# EAGLE board OLED Shield R2 (EAGLE 6.4)
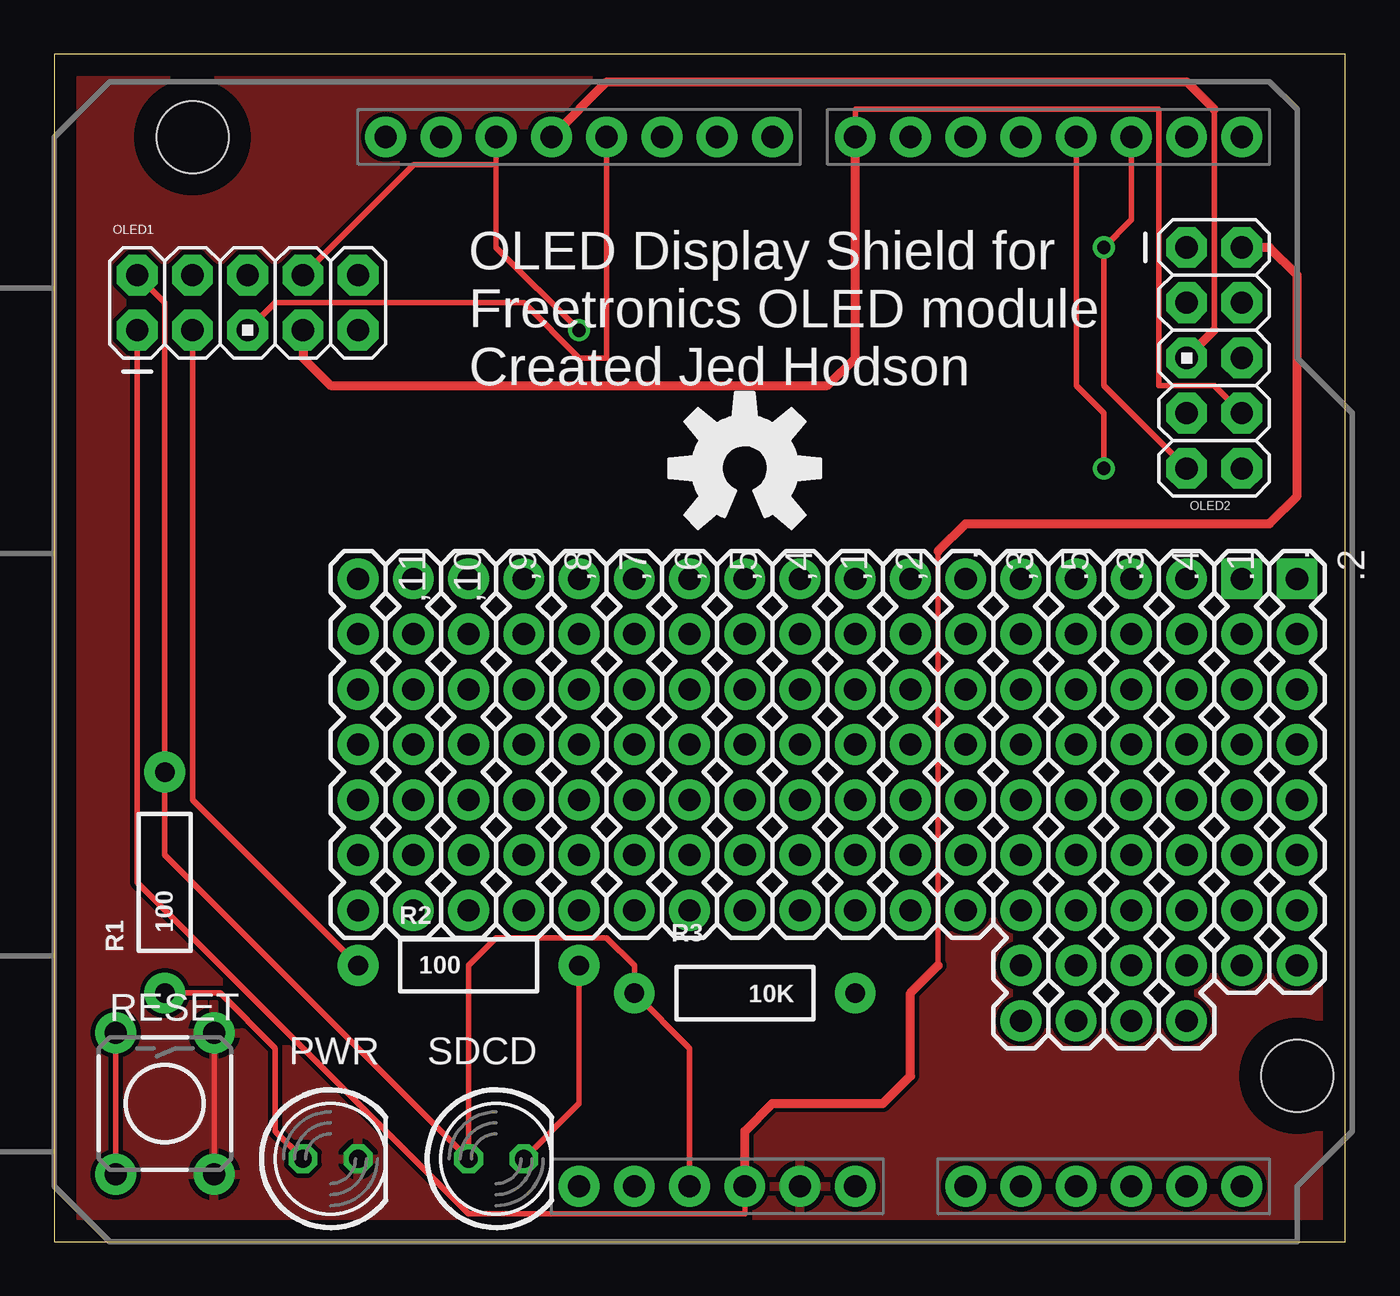
[diagram p0: board, top side]
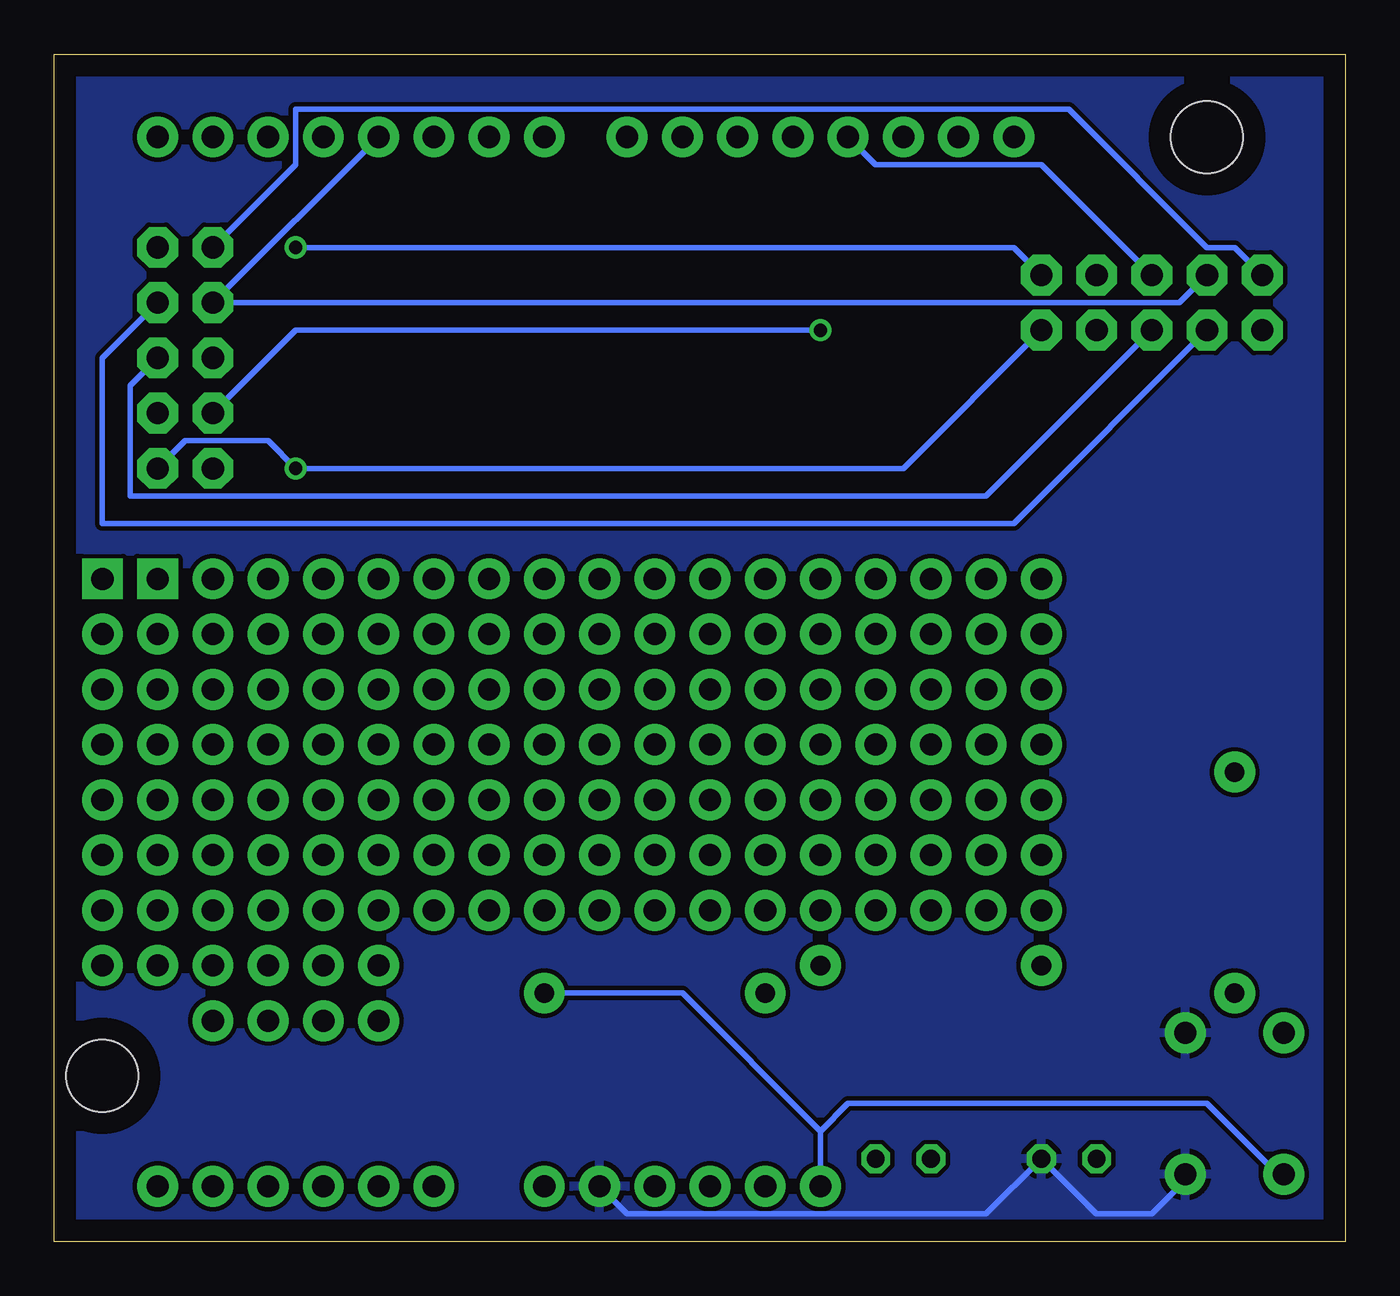
[diagram p1: board, bottom side, seen from below]

Size 59.36 x 54.6 mm. Coordinates in mm from the lower left corner, seen from the top.
Outline: 0,0 59.36,0 59.36,54.6 0,54.6 0,0
Copper layers (1*16): Top 0.035mm / dielectric 1.5mm / Bottom 0.035mm
Design rules "default": minimum track width 10mil, minimum drill 24mil, track to track 8mil, track to pad 8mil, pad to pad 8mil, via to via 8mil, smd to smd 8mil, copper to edge 40mil, drill to drill 8mil, minimum pad ring 10mil, minimum via ring 8mil, stop-mask expansion 4mil, vias tented up to drill 0mil, thermal gap 10mil

## Footprints (pad centres in the part's own frame; a part is rotated, then mirrored left to right if it is on the bottom)
1X07 = drill 1.016 pad 1.88: 1 0,0; 2 2.54,0; 3 5.08,0; 4 7.62,0; 5 10.16,0; 6 12.7,0; 7 15.24,0
1X08 = drill 1.016 pad 1.88 square: 1 0,0 | drill 1.016 pad 1.88: 2 2.54,0; 3 5.08,0; 4 7.62,0; 5 10.16,0; 6 12.7,0; 7 15.24,0; 8 17.78,0
1X09 = drill 1.016 pad 1.88: 1 0,0; 2 2.54,0; 3 5.08,0; 4 7.62,0; 5 10.16,0; 6 12.7,0; 7 15.24,0; 8 17.78,0; 9 20.32,0
AVR_ICSP = drill 1.016 pad 1.88 octagon: 1 -1.27,5.08; 2 1.27,5.08; 3 -1.27,2.54; 4 1.27,2.54; 5 -1.27,0; 6 1.27,0; 7 -1.27,-2.54; 8 1.27,-2.54; 9 -1.27,-5.08; 10 1.27,-5.08
LED5MM = drill 0.813 octagon: A -1.27,0; K 1.27,0
AXIAL-0.4 = drill 0.9 pad 1.88: P$1 -5.08,0; P$2 5.08,0
TACTILE-PTH = drill 1.016 pad 1.88: 1 -3.251,2.261; 2 3.251,2.261; 3 -3.251,-2.261; 4 3.251,-2.261
DUEMILANOVE_SHIELD_NOLABELS = drill 1.016 pad 1.88: 3.3V 50.8,26.67; 5V 50.8,29.21; A0 50.8,41.91; A1 50.8,44.45; A2 50.8,46.99; A3 50.8,49.53; A4 50.8,52.07; A5 50.8,54.61; AREF 2.54,15.24; D2 2.54,49.53; D3 2.54,46.99; D4 2.54,44.45; D5 2.54,41.91; D6 2.54,39.37; D7 2.54,36.83; D8 2.54,33.02; D9 2.54,30.48; D10 2.54,27.94; D11 2.54,25.4; D12 2.54,22.86; D13 2.54,20.32; GND@0 50.8,31.75; GND@1 50.8,34.29; GND@2 2.54,17.78; RES 50.8,24.13; RX 2.54,54.61; TX 2.54,52.07; VIN 50.8,36.83 | hole 3.302: 45.72,57.15; 2.54,6.35

## Placement (x,y rotation side)
,  [1X07]  39.37,30.48 270 top
,1  [1X07]  34.29,30.48 270 top
,2  [1X07]  36.83,30.48 270 top
,3  [1X07]  41.91,30.48 270 top
,4  [1X07]  31.75,30.48 270 top
,5  [1X07]  29.21,30.48 270 top
,6  [1X07]  26.67,30.48 270 top
,7  [1X07]  24.13,30.48 270 top
,8  [1X07]  21.59,30.48 270 top
,9  [1X07]  19.05,30.48 270 top
,10  [1X07]  16.51,30.48 270 top
,11  [1X07]  13.97,30.48 270 top
.  [1X08]  54.61,30.48 270 top
.1  [1X09]  52.07,30.48 270 top
.2  [1X08]  57.15,30.48 270 top
.3  [1X09]  46.99,30.48 270 top
.4  [1X09]  49.53,30.48 270 top
.5  [1X09]  44.45,30.48 270 top
LOGO1  OSHW-LOGOL  [OSHW-LOGO-L]  31.75,35.56 0 top
OLED1  [AVR_ICSP]  8.89,43.18 90 top
OLED2  [AVR_ICSP]  53.34,40.64 0 top
PWR  [LED5MM]  12.7,3.81 0 top
R1  100  [AXIAL-0.4]  5.08,16.51 90 top
R2  100  [AXIAL-0.4]  19.05,12.7 0 top
R3  10K  [AXIAL-0.4]  31.75,11.43 180 top
RESET  [TACTILE-PTH]  5.08,6.35 270 top
SDCD  [LED5MM]  20.32,3.81 0 top
U1  ARDUINO_SHIELDNOLABELS  [DUEMILANOVE_SHIELD_NOLABELS]  0,53.34 270 top

## Library data of the parts
, ,1-,11 . .1-.5 OLED1 OLED2 = SparkFun-Connectors
LOGO1 = SparkFun-Aesthetics
PWR SDCD = led
R1-R3 = SparkFun-Passives
RESET = SparkFun-Electromechanical
U1 = SparkFun-Boards

## Nets
GND: PWR.K RESET.1 RESET.2 U1.GND@1
N$1: OLED1.2 OLED2.1 R1.P$2 R3.P$2 SDCD.A U1.5V
N$2: PWR.A R1.P$1
N$3: OLED1.10 OLED2.9 U1.D2
N$4: OLED1.1 OLED2.2 U1.GND@0
N$5: OLED1.4 OLED2.3 U1.D4
N$6: R2.P$2 SDCD.K
N$7: OLED1.6 OLED2.5 U1.D12
N$8: OLED1.5 OLED2.6 U1.D11
N$9: OLED1.8 OLED2.7 U1.D13
N$10: OLED1.7 OLED2.8 U1.D7
N$12: R3.P$1 RESET.3 RESET.4 U1.RES
N$17: OLED1.3 OLED2.4 R2.P$1
N$18: OLED1.9 OLED2.10 U1.D3

## Tracks (layer width: path | path; a pad name or v marks a point on that pad's centre or on a via)
GND
  Top 0.254: RESET.1 RESET.2
  Bottom 0.254: U1.GND@1 33.02,1.27 16.51,1.27 PWR.K 11.43,1.27 8.89,1.27 7.34,2.82 RESET.2
  pour Bottom: 0,54.61 59.69,54.61 59.69,0 0,0
  pour Top: 0,54.61 59.69,54.61 59.69,0 0,0
N$1
  Top 0.254: OLED1.2 5.08,43.18 R1.P$2 5.08,17.78 SDCD.A 19.05,12.7 20.32,13.97 25.4,13.97 26.67,12.7 R3.P$2 29.21,8.89 U1.5V
  Bottom 0.254: OLED2.1 48.26,49.53 48.26,52.07 12.7,52.07 6.35,45.72 5.08,45.72 OLED1.2
N$2
  Top 0.254: R1.P$1 7.62,11.43 10.16,8.89 10.16,5.08 PWR.A
N$3  (via drill 0.61)
  Top 0.254: v48.26,45.72 49.53,46.99 U1.D2 | 48.26,39.37 OLED2.9 | v48.26,45.72 48.26,39.37 | v48.26,45.72 48.26,39.37
  Bottom 0.254: OLED1.10 15.24,45.72 v48.26,45.72
N$4
  Top 0.254: OLED1.1 3.81,16.51 19.05,1.27 31.75,1.27 U1.GND@0 | 40.64,12.7 40.64,31.75
  Top 0.406: U1.GND@0 31.75,5.08 33.02,6.35 38.1,6.35 39.37,7.62 39.37,11.43 40.64,12.7 | 40.64,31.75 41.91,33.02 55.88,33.02 57.15,34.29 57.15,44.45 55.88,45.72 OLED2.2
N$5
  Bottom 0.254: OLED1.4 7.62,43.18 OLED2.3 U1.D4
N$6
  Top 0.254: SDCD.K 24.13,6.35 R2.P$2
N$7
  Top 0.254: 53.34,52.07 53.34,41.91
  Top 0.406: U1.D12 25.4,53.34 52.07,53.34 53.34,52.07 | 53.34,41.91 OLED2.5
  Bottom 0.254: OLED1.6 13.97,49.53 21.59,49.53 U1.D12
N$8
  Top 0.254: OLED1.5 10.16,43.18 21.59,43.18 24.13,40.64 25.4,40.64 U1.D11
  Bottom 0.254: OLED2.6 55.88,39.37 55.88,34.29 16.51,34.29 OLED1.5
N$9  (via drill 0.61)
  Top 0.254: OLED1.8 16.51,49.53 20.32,49.53 | U1.D13 20.32,49.53 | v24.13,41.91 20.32,45.72 20.32,49.53
  Bottom 0.254: OLED2.7 48.26,41.91 v24.13,41.91
N$10
  Top 0.254: OLED2.8 53.34,39.37 50.8,39.37 50.8,52.07 36.83,52.07 U1.D7
  Top 0.406: OLED1.7 11.43,40.64 12.7,39.37 35.56,39.37 36.83,40.64 U1.D7
N$12
  Top 0.254: RESET.3 RESET.4
  Bottom 0.254: RESET.4 3.1,3.1 6.35,6.35 22.86,6.35 24.13,5.08 | 24.13,5.08 U1.RES | R3.P$1 30.48,11.43 24.13,5.08
N$17
  Top 0.254: R2.P$1 6.35,20.32 OLED1.3
  Bottom 0.254: OLED2.4 57.15,40.64 57.15,33.02 15.24,33.02 OLED1.3
N$18  (via drill 0.61)
  Top 0.254: v48.26,35.56 48.26,38.1 46.99,39.37 U1.D3
  Bottom 0.254: OLED2.10 53.34,36.83 49.53,36.83 v48.26,35.56 20.32,35.56 OLED1.9

## Text on the board
tNames: OLED Display Shield for / Freetronics OLED module / Created Jed Hodson